# Altium PCB PickPlaceFeederPCB.PcbDoc
Units mm, origin at the board's own origin, x right, y up, seen from the top; angles counter-clockwise.
Board outline 12.15 x 52.5 mm, 2 copper layers (Top Layer, Bottom Layer), stack 1.671 mm thick; 8 components, 7 nets, 21 pads, 39 vias.
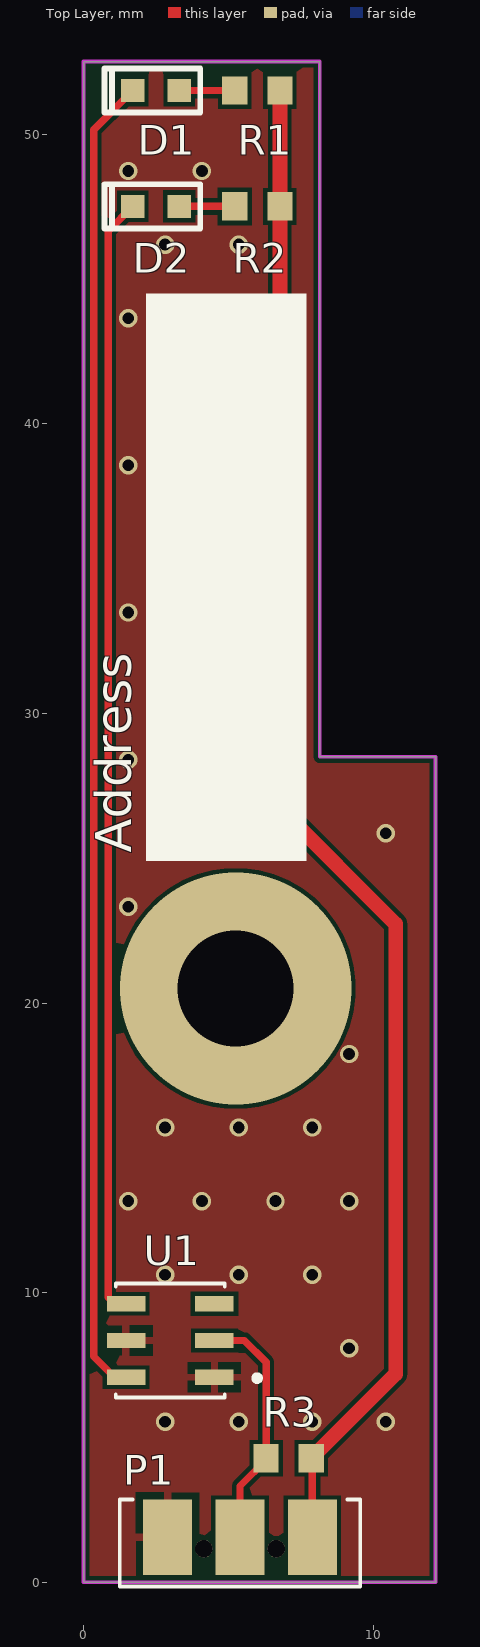
[diagram p0: Top Layer view]
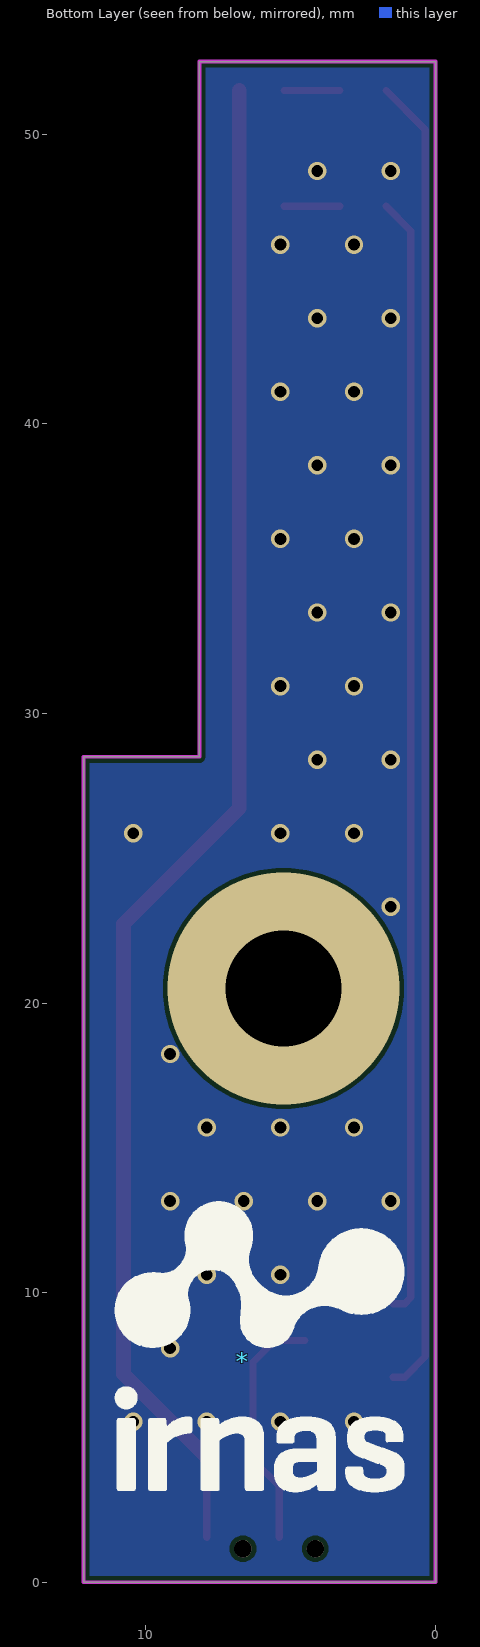
[diagram p1: Bottom Layer view, seen from below]
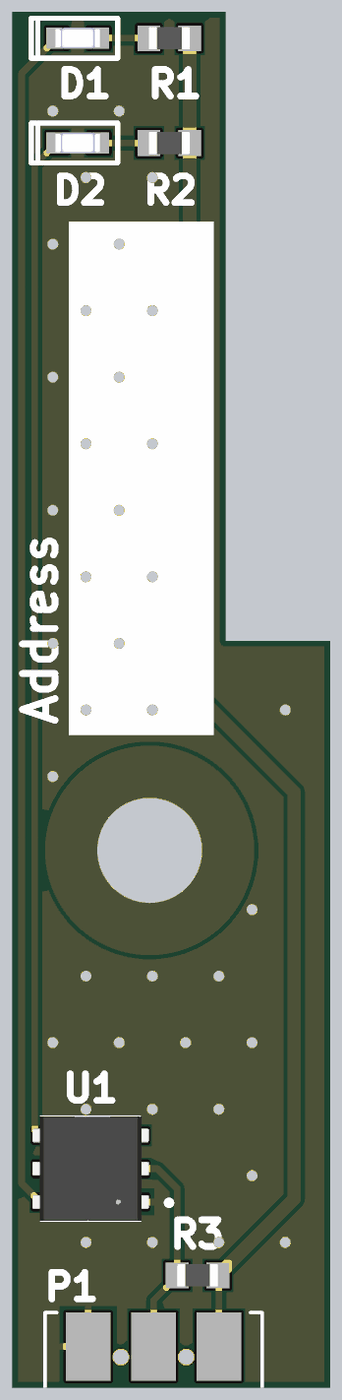
[diagram p2: 3D render of the assembled board from above, using the file's embedded part models]

## Layer stack, top to bottom
Top Solder: solder mask 0.0102, Solder Resist, Dk 3.5
Top Layer: signal copper 0.0356
Dielectric 1: dielectric 1.6, FR-4, Dk 4.8
Bottom Layer: signal copper 0.0356
Bottom Solder: solder mask 0.0102, Solder Resist, Dk 3.5

## Board outline
0,0 0,52.5 8.15,52.5 8.15,28.5 12.15,28.5 12.15,0

## Design rules (kind name [scope] priority, off if disabled: settings)
Clearance [All] p1: gap=0.152 ignorepadtopadclearanceinfootprint=TRUE
ComponentClearance [All] p1: gap=0 collisioncheckmode=3 verticalgap=0 showdistances=FALSE
HoleSize [All] p1: absolutevalues=TRUE maxlimit=10 minlimit=0.3 maxpercent=80.000 minpercent=20.000
PolygonConnect PolygonConnect_2 [All vs IsNamedPolygon('GND_L01_P000')] p1: thpad.connectstyle=Relief thpad.reliefconductorwidth=0.254 thpad.reliefentries=4 thpad.polygonreliefangle="90 Angle" thpad.airgapwidth=0.254 smdpad.connectstyle=Relief smdpad.reliefconductorwidth=0.254 smdpad.reliefentries=4 smdpad.polygonreliefangle="90 Angle" smdpad.airgapwidth=0.254 via.connectstyle=Direct via.reliefconductorwidth=0.254 via.reliefentries=4 via.polygonreliefangle="90 Angle" via.airgapwidth=0.254
PolygonConnect PolygonConnect_1 [All vs IsNamedPolygon('GND_L01_P000')] p2: connectstyle=Relief reliefconductorwidth=0.254 reliefentries=4 polygonreliefangle="90 Angle" airgapwidth=0.254
PolygonConnect [All] p3: connectstyle=Direct reliefconductorwidth=0.254 reliefentries=4 polygonreliefangle="90 Angle" airgapwidth=0.254
RoutingVias [All] p1: holewidth=0.3 width=0.5 viastyle="Through Hole" minholewidth=0.3 minwidth=0.5 maxholewidth=0.3 maxwidth=0.5
SilkToSilkClearance [All] p1: silktosilkclearance=0
SilkToSolderMaskClearance [IsPad] p1: minsilkscreentomaskgap=0.152 clearancetoexposedcopper=TRUE
SolderMaskExpansion [All] p1: expansion=0.102 istentingtop=FALSE
Width [All] p1: maxlimit=3 minlimit=0.203 preferedwidth=0.203
26 further rules are at their usual default settings.

## Components (designator, comment, footprint, x,y, rotation, side; value= is the part's Value field where it differs from the comment)
* "IRNAS logo3-10mm" LOGO_3-10mm 6.65,7.62 r180 bottom
D1 "LED GREEN" LED0603 2.5,51.5 r0 top
D2 "LED RED" LED0603 2.5,47.5 r0 top
P1 "''" Pogo_pin_3pos_90deg 5.4,1.36 r180 top
R1 "CRCW06030000Z0EAHP" "Res [0603/1608]" 6,51.5 r180 top
R2 "CRCW06030000Z0EAHP" "Res [0603/1608]" 6,47.5 r180 top
R3 "CRCW06034K70JNEA" "Res [0603/1608]" 7.08,4.28 r180 top
U1 "DS2413P+" TSOC-6 2.99,8.35 r180 top

## Footprints (in the part's own frame and the unit in brackets; to place one, negate y for a bottom-side part, rotate by r counter-clockwise, add the part's x,y. Pads: shape width x height; smd on the part's side, far side on the other; paste and mask are expansions set on the pad)
LED0603 [mm]
  rect 0.8x0.8 smd: 1(-0.8,0) 2(0.8,0)
  silkscreen extent -1.78,-0.76 1.52,0.76, body extent -0.85,-0.4 0.85,0.4, height 0.66
LOGO_3-10mm [mm]
  silkscreen extent -4.42,-4.51 5.57,5.53
Pogo_pin_3pos_90deg [mm]
  round 0.6 hole 0.6 mask+0.05: 0(-1.25,0.2) 0(1.25,0.2)
  rect 1.7x2.6 smd: 1(-2.5,-0.2) 2(0,-0.2) 3(2.5,-0.2)
  silkscreen extent -4.15,-1.5 4.15,1.5
"Res [0603/1608]" [mm]
  rect 0.87x0.98 smd: 1(-0.78,0) 2(0.78,0)
  body extent -0.77,-0.42 0.78,0.43, height 0.5
TSOC-6 [mm]
  rect 1.33x0.53 smd: 1(-1.525,1.27) 2(-1.525,0) 3(-1.525,-1.27) 4(1.525,-1.27) 5(1.525,0) 6(1.525,1.27)
  silkscreen extent -3.1,-1.97 1.88,1.97, body extent -2.22,-1.99 2.22,1.99, height 1.5

## Part data
D1: library part "LED - LED GREEN", "HSME-C191 -  LED, Green, SMD, 0603, 20 mA, 2.1 V, 572 nm", Forward Current If=20, Forward Voltage=2.1, LED Colour=Red, Manufacturer="BROADCOM LIMITED", Manufacturer Part Number=HSMS-C190, Supplier Part Number 1=1219743, Automotive Qualification Standard=-, Bulb Size=-, ComponentLink3Description=Datasheet, ComponentLink3URL=http://www.farnell.com/datasheets/2095939.pdf?_ga=2.85835929.1644194861.1561957338-1373726713.1554121096, LED Mounting=SMD, Lens Shape=Rectangular, Luminous Intensity=10, MSL=-, Packaging="Cut Tape", Pricing 1="1=0.361, 10=0.256, 50=0.235, 100=0.106, 200=0.101 (GBP)", Product Range=-, RoHS=YES, Stock 1=7534, Supplier 1=Farnell, SVHC="No SVHC (17-Dec-2015)<!--FANDB--><div class=\"features-and-benefits-container\"><div class=\"features-and-benefits-description\"><span class=\"features-benefits-value\">The HSMS-C190 is a HER SMD Chip LED with untinted/diffused lens, made of GaP. It is designed in an industry standard package 1.6 x 0.8mm footprint with 0.8mm profile. It is compatible with IR reflow solder processes. The small size and wide viewing angle make this LED prime choices for backlighting applications and front panel illumination especially where space is a premium.</span></div><div class=\"features-and-benefits-list\"><ul class=\"features-and-benefits-list-list\"><li class=\"features-and-benefits-list-item\">Small size</li><li class=\"features-and-benefits-list-item\">Industry standard footprint</li><li class=\"features-and-benefits-list-item\">Compatible with IR solder</li><li class=\"features-and-benefits-list-item\">Diffused optics</li><li class=\"features-and-benefits-list-item\">-40 to 85", Viewing Angle=170°, Wavelength Typ=626
D2: library part "LED - LED RED", "BROADCOM LIMITED - HSMS-C190 - LED, RED, 10MCD, 626NM", Forward Current If=20, Forward Voltage=2.1, LED Colour=Red, Manufacturer="BROADCOM LIMITED", Manufacturer Part Number=HSMS-C190, Supplier Part Number 1=2497356, Automotive Qualification Standard=-, Bulb Size=-, ComponentLink1Description=http://www.farnell.com/datasheets/313031.pdf, ComponentLink1URL=http://www.farnell.com/datasheets/313031.pdf, ComponentLink2Description=http://www.farnell.com/datasheets/1681524.pdf, ComponentLink2URL=http://www.farnell.com/datasheets/1681524.pdf, ComponentLink3Description=http://www.farnell.com/datasheets/2165483.pdf, ComponentLink3URL=http://www.farnell.com/datasheets/2165483.pdf, LED Mounting=SMD, Lens Shape=Rectangular, Luminous Intensity=10, MSL=-, Packaging="Cut Tape", Pricing 1="1=0.361, 10=0.256, 50=0.235, 100=0.106, 200=0.101 (GBP)", Product Range=-, RoHS=YES, Stock 1=7534, Supplier 1=Farnell, SVHC="No SVHC (17-Dec-2015)<!--FANDB--><div class=\"features-and-benefits-container\"><div class=\"features-and-benefits-description\"><span class=\"features-benefits-value\">The HSMS-C190 is a HER SMD Chip LED with untinted/diffused lens, made of GaP. It is designed in an industry standard package 1.6 x 0.8mm footprint with 0.8mm profile. It is compatible with IR reflow solder processes. The small size and wide viewing angle make this LED prime choices for backlighting applications and front panel illumination especially where space is a premium.</span></div><div class=\"features-and-benefits-list\"><ul class=\"features-and-benefits-list-list\"><li class=\"features-and-benefits-list-item\">Small size</li><li class=\"features-and-benefits-list-item\">Industry standard footprint</li><li class=\"features-and-benefits-list-item\">Compatible with IR solder</li><li class=\"features-and-benefits-list-item\">Diffused optics</li><li class=\"features-and-benefits-list-item\">-40 to 85", Viewing Angle=170°, Wavelength Typ=626
P1: library part "Pogo_pin_SMD [3 positions, 90deg, SMD]"
R1 R2: library part Res_220_Ohm_[0603/1608], "Res Thick Film 0603 220 Ohm 5% 1/10W ±200ppm/°C Molded SMD Paper T/R", Case Code (Imperial)=0603, Case Code (Metric)=1608, Manufacturer="Vishay Dale", Max Operating Temperature=155°C, Max Power Dissipation=250mW, Min Operating Temperature=-55°C, Package Quantity=5000, Resistance=220, Resistance Tolerance=5%, Resistor Type="Thick Film", Supplier Part Number 1=71-CRCW06030000Z0EAH, Temperature Coefficient=0ppm/°C, Voltage Rating=75V, Case/Package=0603, Category="Chip SMD Resistors", ComponentLink1Description=https://datasheet.ciiva.com/2472/crcwhpe3-2472033.pdf?src-supplier=Digi-Key, ComponentLink1URL=https://datasheet.ciiva.com/2472/crcwhpe3-2472033.pdf?src-supplier=Digi-Key, ComponentLink2Description=https://datasheet.ciiva.com/2472/crcwhpe3-2472034.pdf?src-supplier=Digi-Key, ComponentLink2URL=https://datasheet.ciiva.com/2472/crcwhpe3-2472034.pdf?src-supplier=Digi-Key, ComponentLink3Description=https://datasheet.ciiva.com/2472/crcwhpe3-2472035.pdf?src-supplier=Digi-Key, ComponentLink3URL=https://datasheet.ciiva.com/2472/crcwhpe3-2472035.pdf?src-supplier=Digi-Key, ComponentLink4Description=https://datasheet.ciiva.com/8340/crcwhpe3-8340198.pdf?src-supplier=Avnet, ComponentLink4URL=https://datasheet.ciiva.com/8340/crcwhpe3-8340198.pdf?src-supplier=Avnet, ComponentLink5Description=https://datasheet.ciiva.com/16430/crcwhpe3-16430059.pdf?src-supplier=Future+Electronics, ComponentLink5URL=https://datasheet.ciiva.com/16430/crcwhpe3-16430059.pdf?src-supplier=Future+Electronics, ComponentLink6Description=https://datasheet.ciiva.com/28621/1912814-28621358.pdf?src-supplier=Element14, ComponentLink6URL=https://datasheet.ciiva.com/28621/1912814-28621358.pdf?src-supplier=Element14, ComponentLink7Description=https://datasheet.ciiva.com/2524/dcrcwe3-2524384.pdf?src-supplier=Digi-Key, ComponentLink7URL=https://datasheet.ciiva.com/2524/dcrcwe3-2524384.pdf?src-supplier=Digi-Key, ComponentLink8Description=https://datasheet.ciiva.com/2524/dcrcwe3-2524385.pdf?src-supplier=Digi-Key, ComponentLink8URL=https://datasheet.ciiva.com/2524/dcrcwe3-2524385.pdf?src-supplier=Digi-Key, ComponentLink9Description=https://datasheet.ciiva.com/2524/dcrcwe3-2524386.pdf?src-supplier=Digi-Key, ComponentLink9URL=https://datasheet.ciiva.com/2524/dcrcwe3-2524386.pdf?src-supplier=Digi-Key, ComponentLink10Description=https://datasheet.ciiva.com/8339/dcrcwe3-8339958.pdf?src-supplier=Avnet, ComponentLink10URL=https://datasheet.ciiva.com/8339/dcrcwe3-8339958.pdf?src-supplier=Avnet, ComponentLink11Description=https://datasheet.ciiva.com/22869/70201119-22869142.pdf?src-supplier=Allied+Electronics, ComponentLink11URL=https://datasheet.ciiva.com/22869/70201119-22869142.pdf?src-supplier=Allied+Electronics, ComponentLink12Description=https://datasheet.ciiva.com/46448/1807946-46448601.pdf?src-supplier=Element14, ComponentLink12URL=https://datasheet.ciiva.com/46448/1807946-46448601.pdf?src-supplier=Element14, ComponentLink13Description=https://datasheet.ciiva.com/5550/dcrcwe3-109170-5550730.pdf?src-supplier=Mouser, ComponentLink13URL=https://datasheet.ciiva.com/5550/dcrcwe3-109170-5550730.pdf?src-supplier=Mouser, Construction=Rectangular, Contact Plating=Tin, Depth=0.85mm, Features="Automotive AEC-Q200", Height=0.45mm, Lead Free="Lead Free", Length=1.6mm, Manufacturer Part Number=CRCW06030000Z0EAHP, Military Standard=Not, Mount="Surface Mount", Number of Pins=2, Number of Terminations=2, Packaging="Tape and Reel", Power Rating=250mW, Pricing 1="1=0.14000, 10=0.06200, 50=0.06200, 100=0.03300, 1000=0.02300, 10000=0.01600 (USD)", Pricing 2="1=0.10000, 10=0.03400, 50=0.03400, 100=0.01400, 1000=0.00700, 10000=0.00500 (USD)", Radiation Hardening=No, REACH SVHC=Unknown, RoHS=Yes, RoHS Compliant=Yes, Series=CRCW-HP, Size Code=0603, Stock 1=129043, Stock 2=26122, Supplier 1=Mouser, Supplier 2=Mouser, Supplier Part Number 2=71-CRCW0603J-220-E3, Technology="THICK FILM", Termination=SMD/SMT, Tolerance=5%, Voltage Rating (DC)=75V, Weight=7.1E-05oz, Width=0.033inch, Working Voltage=75V
R3: library part Res_4k7_Ohm_[0603/1608], "Res Thick Film 0603 4.7 kOhm 5% 0.1W(1/10W) ±200ppm/°C Pad SMD T/R", Case Code (Imperial)=0603, Case Code (Metric)=1608, Manufacturer=Vishay, Max Operating Temperature=155°C, Max Power Dissipation=100mW, Min Operating Temperature=-55°C, Package Quantity=1, Resistance=4k7, Resistance Tolerance=5%, Resistor Type="Thick Film", Supplier Part Number 1=71-CRCW0603J-4.7K-E3, Temperature Coefficient=200ppm/°C, Voltage Rating=75V, Case/Package=0603, Category="Chip SMD Resistors", ComponentLink1Description=https://datasheet.ciiva.com/16215/dcrcwe3-16215767.pdf?src-supplier=Future+Electronics, ComponentLink1URL=https://datasheet.ciiva.com/16215/dcrcwe3-16215767.pdf?src-supplier=Future+Electronics, ComponentLink2Description=https://datasheet.ciiva.com/5546/dcrcwe3-109170-5546457.pdf?src-supplier=Mouser, ComponentLink2URL=https://datasheet.ciiva.com/5546/dcrcwe3-109170-5546457.pdf?src-supplier=Mouser, ComponentLink3Description=https://datasheet.ciiva.com/2461/dcrcwe3-2461995.pdf?src-supplier=Digi-Key, ComponentLink3URL=https://datasheet.ciiva.com/2461/dcrcwe3-2461995.pdf?src-supplier=Digi-Key, ComponentLink4Description=https://datasheet.ciiva.com/16755/70201119-16755067.pdf?src-supplier=Allied+Electronics, ComponentLink4URL=https://datasheet.ciiva.com/16755/70201119-16755067.pdf?src-supplier=Allied+Electronics, ComponentLink5Description=https://datasheet.ciiva.com/26821/getdatasheetpartid-88043-26821115.pdf?src-supplier=Verical, ComponentLink5URL=https://datasheet.ciiva.com/26821/getdatasheetpartid-88043-26821115.pdf?src-supplier=Verical, ComponentLink6Description=https://datasheet.ciiva.com/2461/dcrcwe3-2461996.pdf?src-supplier=Digi-Key, ComponentLink6URL=https://datasheet.ciiva.com/2461/dcrcwe3-2461996.pdf?src-supplier=Digi-Key, ComponentLink7Description=https://datasheet.ciiva.com/2461/dcrcwe3-2461997.pdf?src-supplier=Digi-Key, ComponentLink7URL=https://datasheet.ciiva.com/2461/dcrcwe3-2461997.pdf?src-supplier=Digi-Key, ComponentLink8Description=https://datasheet.ciiva.com/16772/70201119-16772847.pdf?src-supplier=Allied+Electronics, ComponentLink8URL=https://datasheet.ciiva.com/16772/70201119-16772847.pdf?src-supplier=Allied+Electronics, Construction=Rectangular, Contact Plating=Tin, Depth=0.85mm, Features="Automotive AEC-Q200", Height=0.45mm, Lead Free="Lead Free", Length=1.55mm, Manufacturer Part Number=CRCW06034K70JNEA, Military Standard=Not, Mount="Surface Mount", Number of Terminations=2, Packaging="Tape and Reel", Power Rating=100mW, Pricing 1="1=0.10000, 10=0.03400, 50=0.03400, 100=0.01400, 1000=0.00700, 10000=0.00500 (USD)", Radiation Hardening=No, REACH SVHC=Unknown, RoHS=Yes, RoHS Compliant=Yes, Series=CRCW, Size Code=0603, Supplier 1=Mouser, Technology="THICK FILM", Termination=SMD/SMT, Tolerance=5%, Voltage Rating (DC)=75V, Weight=7.1E-05oz, Width=0.85mm
U1: "1-Wire, Dual-Channel, Addressable Switch Features Open-Drain, Programmable I/O Pins", Low Level Output Current=20mA, Manufacturer=Maxim, Max Operating Temperature=70°C, Max Supply Voltage=5.25V, Min Operating Temperature=0°C, Min Supply Voltage=2.8V, On-State Resistance=20R, Operating Supply Current=70uA, Package Quantity=120, Quiescent Current=24uA, Supplier Part Number 1=700-DS2413P, Category=Memory, ComponentLink1Description=https://datasheet.ciiva.com/2080/ds2413-2080624.pdf?src-supplier=Digi-Key, ComponentLink1URL=https://datasheet.ciiva.com/2080/ds2413-2080624.pdf?src-supplier=Digi-Key, ComponentLink2Description=https://datasheet.ciiva.com/1176/ds2413-1176081.pdf?src-supplier=Newark, ComponentLink2URL=https://datasheet.ciiva.com/1176/ds2413-1176081.pdf?src-supplier=Newark, ComponentLink3Description=https://datasheet.ciiva.com/14100/07386164-14100015.pdf?src-supplier=Distrelec, ComponentLink3URL=https://datasheet.ciiva.com/14100/07386164-14100015.pdf?src-supplier=Distrelec, ComponentLink4Description=https://datasheet.ciiva.com/16617/ds2413-16617017.pdf?src-supplier=Avnet+Europe, ComponentLink4URL=https://datasheet.ciiva.com/16617/ds2413-16617017.pdf?src-supplier=Avnet+Europe, ComponentLink5Description=https://datasheet.ciiva.com/1171/ds2413-1171804.pdf?src-supplier=Farnell, ComponentLink5URL=https://datasheet.ciiva.com/1171/ds2413-1171804.pdf?src-supplier=Farnell, ComponentLink6Description=https://datasheet.ciiva.com/1168/1911564-1168205.pdf?src-supplier=Element14, ComponentLink6URL=https://datasheet.ciiva.com/1168/1911564-1168205.pdf?src-supplier=Element14, Contact Plating=Tin,Matte, Height=1.35mm, Lead Free="Lead Free", Length=4mm, Manufacturer Part Number=DS2413P+, Mount="Surface Mount", Number of Pins=6, Packaging=Rail/Tube, Radiation Hardening=No, REACH SVHC=Unknown, RoHS=Yes, RoHS Compliant=Yes, Series=-, Supplier 1=Mouser, Supplier 2=Farnell, Supplier Part Number 2=2072030, Throw Configuration=SPST, Width=3.89mm

## Via types
v1: diameter 0.635, hole 0.406, Top Layer to Bottom Layer, tented both sides, 38 vias
v2: diameter 8, hole 4, Top Layer to Bottom Layer, 1 vias

## Nets (pads, with @x,y where several pads share a name; then routed paths per layer and width w, separated by ;. In a path a pad name is that pad's centre, name@x,y a point inside that pad or via, vN(x,y) a via of type N, cw(c..) or ccw(c..) an arc to the next point about the centre after c; other vN are vias at no path point)
+5: P1.1 R1.1 R2.1 R3.1 | length 52.8
  Top Layer w0.254: R3.1 7.9,4.24 P1.1
  Top Layer w0.508: R1.1 R2.1 6.78,26.72 10.775,22.725 10.775,7.195 R3.1
GND: P1.3 U1.1 U1.5
  other v1: 2.815,5.541 5.355,5.541 7.895,5.541 10.435,5.541 9.165,8.081 2.815,10.621 5.355,10.621 7.895,10.621 1.545,13.161 4.085,13.161 6.625,13.161 9.165,13.161 2.815,15.701 5.355,15.701 7.895,15.701 9.165,18.241 1.545,23.321 2.815,25.861 5.355,25.861 10.435,25.861 1.545,28.401 4.085,28.401 2.815,30.941 5.355,30.941 1.545,33.481 4.085,33.481 2.815,36.021 5.355,36.021 1.545,38.561 4.085,38.561 2.815,41.101 5.355,41.101 1.545,43.641 4.085,43.641 2.815,46.181 5.355,46.181 1.545,48.721 4.085,48.721
NetD1_1: D1.1 U1.6 | length 45.7
  Top Layer w0.254: U1.6 1.065,7.08 0.35,7.795 0.35,50.15 D1.1
NetD1_2: D1.2 R1.2 | length 1.9
  Top Layer w0.254: D1.2 R1.2
NetD2_1: D2.1 U1.4 | length 38.7
  Top Layer w0.254: U1.4 1.065,9.62 0.85,9.835 0.85,46.65 D2.1
NetD2_2: D2.2 R2.2 | length 1.9
  Top Layer w0.254: D2.2 R2.2
NetP1_2: P1.2 R3.2 U1.2 | length 8.5
  Top Layer w0.254: U1.2 5.55,8.35 6.3,7.6 R3.2 6.3,4.225 5.4,3.325 P1.2
pads on no net: P1.0 U1.3
copper on no net:
  other v2: 5.25,20.5

## Polygon pours and split planes (outlines as drawn)
GND on Top Layer "GND_L01_P000" (solid, pour order 0): 0,0 0,52.5 8.15,52.5 8.15,28.5 12.15,28.5 12.15,0
GND on Bottom Layer "GND_L02_P001" (solid, pour order 1): 0,0 0,52.5 8.15,52.5 8.15,28.5 12.15,28.5 12.15,0

## Keep-outs
Keep-Out Layer:
  the board outline again, w0.127

## Silkscreen, mask and mechanical layers (free items; w line width, h text height)
Top Overlay:
  rectangle: 2.15,24.9 7.7,44.5
  text "Address" at 1.646,25.179 h1.25 r90
Mechanical 13:
  drawing of 1098 lines, arcs and shapes, not listed
  text ".Website" at 234.453,-112.367 h2.5
  text ".Company" at 209.953,-112.517 h2.5
  text ".ProjectTitle" at 209.953,-115.867 h2.5
  text ".PCBDesigner" at 209.853,-119.317 h2.5
  text ".Version" at 210.053,-122.667 h2.5
  text ".RevisionDate" at 209.953,-126.217 h2.5
Mechanical 14:
  drawing of 1099 lines, arcs and shapes, not listed
  text ".Company" at -99.197,-112.367 h2.5
  text ".Website" at -123.197,-112.417 h2.5
  text ".ProjectTitle" at -99.197,-115.717 h2.5
  text ".PCBDesigner" at -99.197,-119.167 h2.5
  text ".Version" at -99.197,-122.867 h2.5
  text ".RevisionDate" at -99.197,-126.067 h2.5